# Altium PCB octopus_pcb.PcbDoc
Units mm, origin at the board's own origin, x right, y up, seen from the top; angles counter-clockwise.
Board outline 53.1 x 48.2 mm, 2 copper layers (Top Layer, Bottom Layer), stack 0.976 mm thick; 25 components, 19 nets, 84 pads, 4 vias.
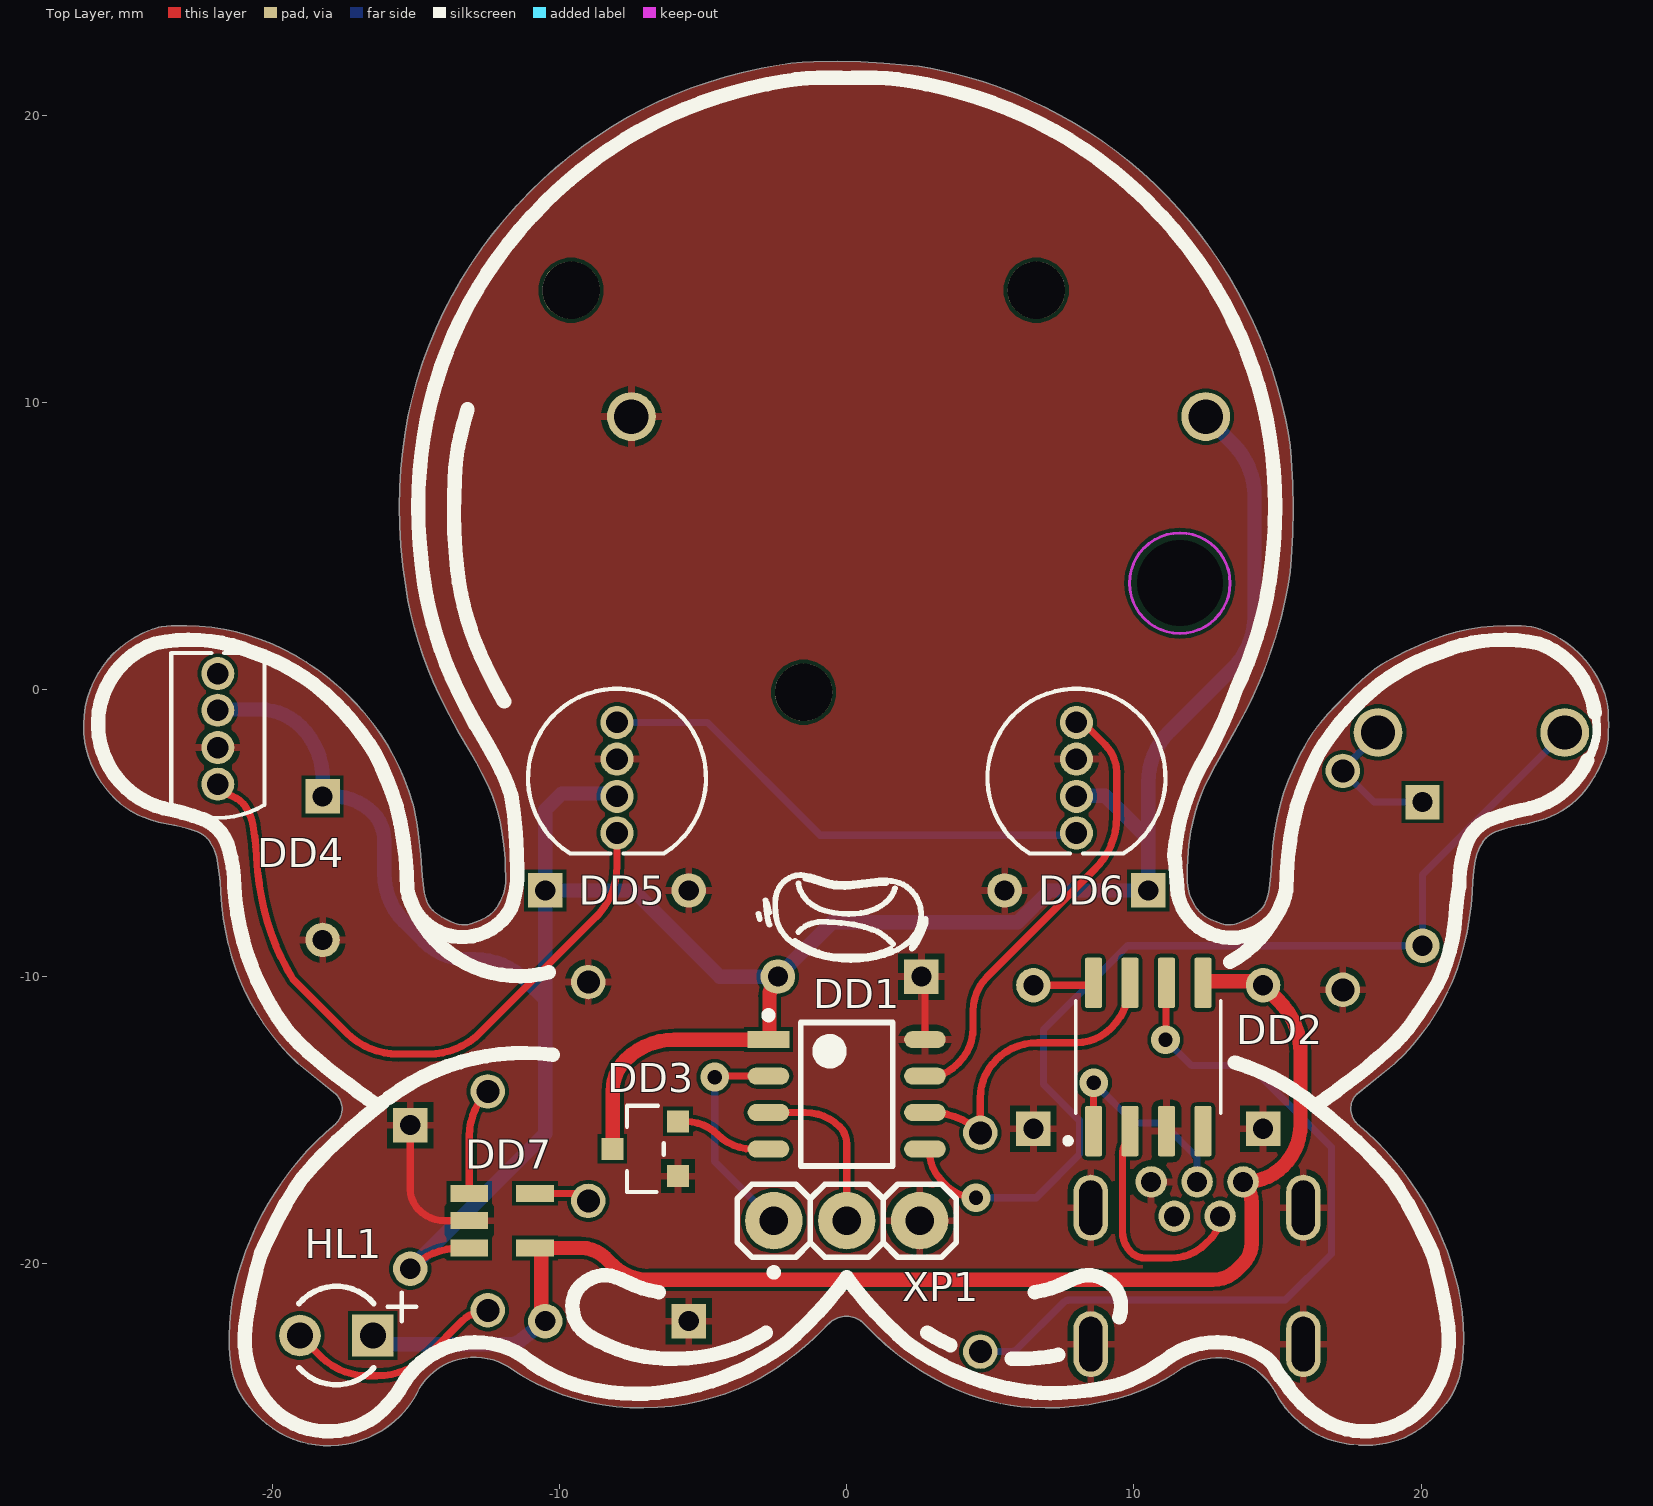
[diagram p0: Top Layer view]
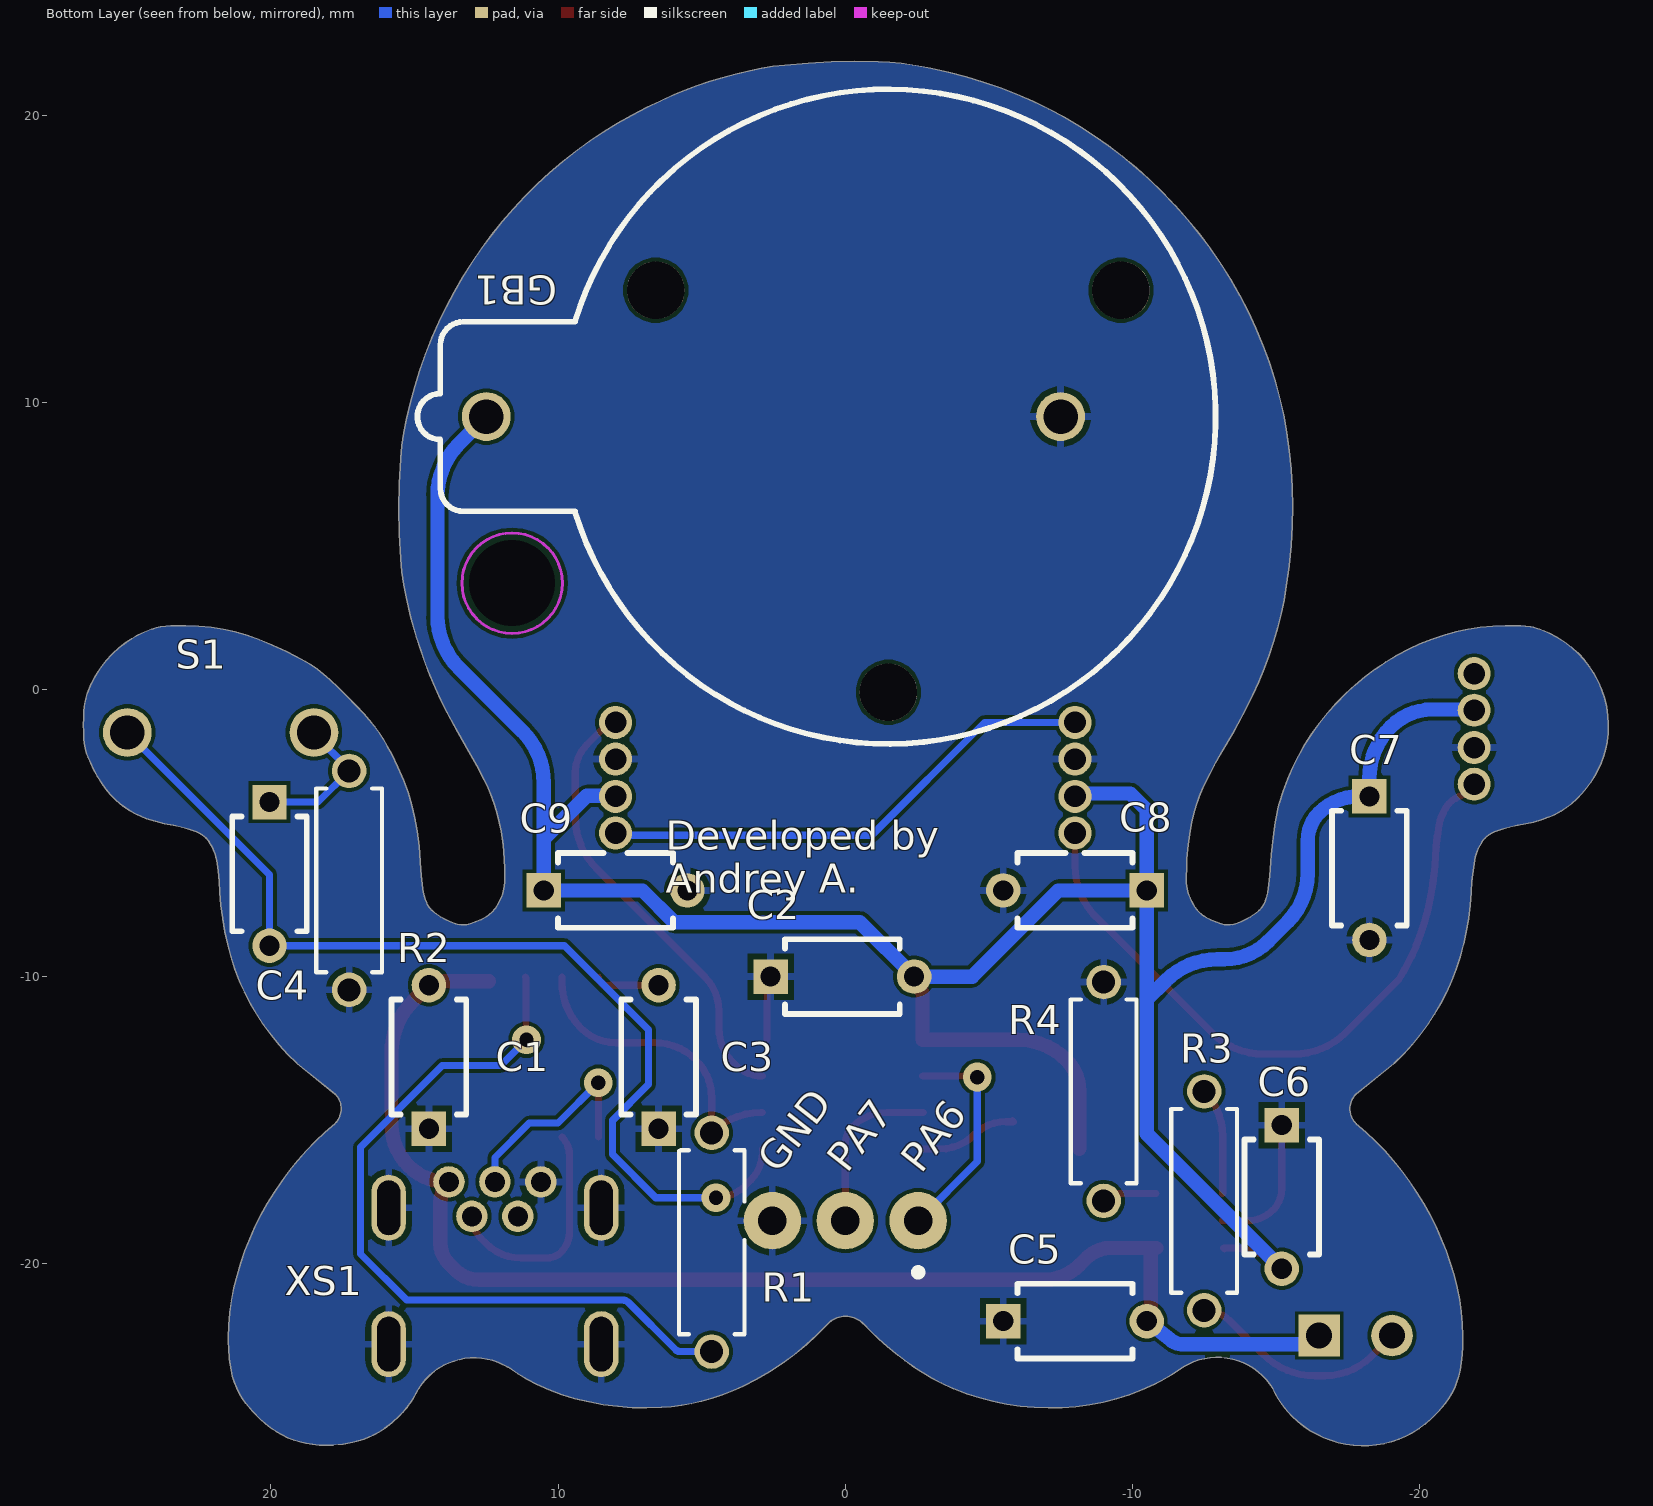
[diagram p1: Bottom Layer view, seen from below]

## Layer stack, top to bottom
Top Solder: solder mask 0.0102, Solder Resist, Dk 3.5
Top Layer: signal copper 0.018
Dielectric 1: dielectric 0.94, FR-4, Dk 4.8
Bottom Layer: signal copper 0.018
Bottom Solder: solder mask 0.0102, Solder Resist, Dk 3.5

## Board outline
313 vertices, not listed, extent -26.574,-26.336 26.528,21.866

## Design rules (kind name [scope] priority, off if disabled: settings)
Clearance [All] p1: gap=0.125 ignorepadtopadclearanceinfootprint=FALSE
HoleSize [All] p1: absolutevalues=TRUE maxlimit=5 minlimit=0.025 maxpercent=80.000 minpercent=20.000
MinimumSolderMaskSliver [All] p1: minsoldermaskwidth=0.1
PolygonConnect [All] p1: connectstyle=Relief reliefconductorwidth=0.254 reliefentries=4 polygonreliefangle="90 Angle" airgapwidth=0.2
RoutingVias [All] p1: holewidth=0.711 width=1.27 viastyle="Through Hole" minholewidth=0.711 minwidth=1.27 maxholewidth=0.711 maxwidth=1.27
SilkToSolderMaskClearance [IsPad] p1: minsilkscreentomaskgap=0.1 clearancetoexposedcopper=TRUE
SolderMaskExpansion [All] p1: expansion=0.102 istentingtop=FALSE
SupplyNets "Schematic Supply Nets_4" [InNet('VBAT')] p1: voltage=0.000
SupplyNets "Schematic Supply Nets_3" [InNet('VIN')] p2: voltage=0.000
SupplyNets "Schematic Supply Nets_2" [InNet('GND')] p3: voltage=0.000
Width [All] p1: maxlimit=0.5 minlimit=0.25 preferedwidth=0.254
27 further rules are at their usual default settings.

## Classes and differential pairs
component class octopus_sch: C1 C2 C3 C4 C5 C6 C7 C8 C9 DD1 DD2 DD3 DD7 GB1 HL1 R1 R2 R3 R4 S S1 XP1 XS1

## Components (designator, comment, footprint, x,y, rotation, side; value= is the part's Value field where it differs from the comment)
C1 "Capacitor" "THT CAP" 14.5,-12.8 r90 bottom value="0,1 мк"
C2 "Capacitor" "THT CAP" 0.1,-10 r180 bottom value="0,1 мк"
C3 "Capacitor" "THT CAP" 6.5,-12.8 r90 bottom value="0,1 мк"
C4 "Capacitor" "THT CAP" 20.05,-6.425 r270 bottom value="0,1 мк"
C5 "Capacitor" "THT CAP" -8,-22 r180 bottom value="4,7 мк"
C6 "Capacitor" "THT CAP" -15.2,-17.675 r270 bottom value="10,0 мк"
C7 "Capacitor" "THT CAP" -18.25,-6.225 r270 bottom value="0,1 мк"
C8 "Capacitor" "THT CAP" -8,-7 r0 bottom value="0,1 мк"
C9 "Capacitor" "THT CAP" 8,-7 r180 bottom value="0,1 мк"
DD1 "ATTINY412-SSN" SOIC-8 0,-14.1 r0 top
DD2 "CH340N" SOP8 10.5,-12.8 r90 top
DD3 "MAX809" SOT23-3 -7,-16 r180 top
DD4 "WS2812B" "LED RGB horizontal" -21.9,-1.375 r90 top
DD5 "WS2812B" LED_RGB_5MM -8,-3.075 r270 top
DD6 "WS2812B" LED_RGB_5MM 8,-3.075 r270 top
DD7 "XT4052" SOT23-5 -12,-18.5 r0 top
GB1 "L-KLS5-CR2032-03" L-KLS5-CR2032-03 -1.5,9.5 r180 bottom
HL1 "LED" 3mm_led_red -17.77,-22.499 r180 top
R1 "Resistor" RES_THT_025W_1k 4.65,-19.25 r270 bottom value="1,0 к"
R2 "Resistor" RES_THT_025W_10k 17.275,-6.65 r270 bottom value="10 к"
R3 "Resistor" RES_THT_025W_1k -12.5,-17.81 r90 bottom value=330
R4 "Resistor" RES_THT_025W_100k -9,-14 r270 bottom value="51 к"
S1 "KLS7-TS3601" KLS7-TS3601 25,-1.5 r180 bottom
XP1 "PLS-3" PLS3 -2.54,-18.5 r90 top
XS1 "Mini-USB-B5F" KLS1-229-5FA 15.9,-18.05 r180 bottom

## Footprints (in the part's own frame and the unit in brackets; to place one, negate y for a bottom-side part, rotate by r counter-clockwise, add the part's x,y. Pads: shape width x height; smd on the part's side, far side on the other; paste and mask are expansions set on the pad)
3mm_led_red [mm]
  rect 1.45x1.45 hole 0.9 paste-2539.97 mask+0: 1(-1.27,0.001)
  round 1.45 hole 0.9 paste-2539.97 mask+0: 2(1.27,0.001)
  silkscreen extent -2.78,-1.71 1.3,1.71, body extent -1.92,-1.92 1.65,1.92, height 5.3
KLS1-229-5FA [mm] "Mini-USB-B5F PCB Right Angle. DIP Type."
  round 1.1 hole 0.7 mask+0.1: 1(2.1,0.9) 2(2.9,-0.3) 3(3.7,0.9) 4(4.5,-0.3) 5(5.3,0.9)
  oval 1.2x2.3 hole 0.8 slot 1.9 at 90 deg mask+0.1: 5(0,-4.75) 5(0,0) 5(7.4,-4.75) 5(7.4,0)
  body extent -0.15,-7.93 7.55,1.07, height 3.95
KLS7-TS3601 [mm]
  round 1.7 hole 1.2 mask+0.1: 1(0,0) 2(6.5,0)
  body extent -0.68,-1.75 7.18,1.75, height 4.2
L-KLS5-CR2032-03 [mm] "L-KLS5-CR2032-03, Держатель батареи CR2032"
  round 2 hole 2 unplated: MH1(-8.1,4.4) MH2(8.1,4.4) MH3(0,-9.6)
  round 1.7 hole 1.2 mask+0.1: N(6,0)
  round 1.7 hole 1.2: P(-14,0)
  silkscreen extent -16.4,-11.4 11.4,11.4, body extent -16.39,-11.4 11.4,11.4, height 8.5
"LED RGB horizontal" [mm] "5mm RGB LED"
  round 1.15 hole 0.75 mask+0.075: 1(1.925,0) 2(0.65,0) 3(-0.65,0) 4(-1.925,0)
  silkscreen extent -3.1,-1.63 2.64,1.63
LED_RGB_5MM [mm] "5mm RGB LED"
  round 1.15 hole 0.75 mask+0.075: 1(1.925,0) 2(0.65,0) 3(-0.65,0) 4(-1.925,0)
  silkscreen extent -3.1,-3.1 2.64,3.1, body extent -2.93,-2.95 2.52,2.95, height 8.6
PLS3 [mm]
  round 2 hole 1: 1(0,0) 2(0,-2.54) 3(0,-5.08)
  silkscreen extent -1.92,-6.35 1.27,1.27, body extent -1.27,-6.35 1.27,1.27, height 8.44
RES_THT_025W_1k [mm]
  round 1.2 hole 0.8: 1(-3.81,0) 2(3.81,0)
  silkscreen extent -3.2,-1.14 3.2,1.14, body extent -4.06,-1.16 4.06,1.16, height 2.87
RES_THT_025W_10k [mm]
  round 1.2 hole 0.8: 1(-3.81,0) 2(3.81,0)
  silkscreen extent -3.2,-1.14 3.2,1.14, body extent -4.06,-1.16 4.06,1.16, height 2.87
RES_THT_025W_100k [mm]
  round 1.2 hole 0.8: 1(-3.81,0) 2(3.81,0)
  silkscreen extent -3.2,-1.14 3.2,1.14, body extent -4.06,-1.16 4.06,1.16, height 2.87
SOIC-8 [mm] "for operational amplifier"
  rect 1.45x0.6 smd: 1(-2.725,1.905)
  oval 1.45x0.6 smd: 2(-2.725,0.635) 3(-2.725,-0.635) 4(-2.725,-1.905) 5(2.725,-1.905) 6(2.725,-0.635) 7(2.725,0.635) 8(2.725,1.905)
  silkscreen extent -2.85,-2.5 1.6,2.88, body extent -3,-2.5 3,2.5, height 1.75
SOP8 [mm]
  rrect25% 1.76x0.6 smd: 1(-2.58,1.905) 2(-2.58,0.635) 3(-2.58,-0.635) 4(-2.58,-1.905) 5(2.58,-1.905) 6(2.58,-0.635) 7(2.58,0.635) 8(2.58,1.905)
  silkscreen extent -3.02,-2.52 1.95,2.89, body extent -3,-2.42 3,2.42, height 2.1
SOT23-3 [mil]
  rect 30x30 smd: 1(-44.29,37.4) 2(-44.29,-37.6) 3(45.71,-0.1)
  silkscreen extent -25,-59 26,59, body extent -48,-60 50,59, height 41
SOT23-5 [mm] "5mm RGB LED"
  rect 1.32x0.59 smd: 1(-1.145,0.95) 2(-1.145,0) 3(-1.145,-0.95) 4(1.145,-0.95) 5(1.145,0.95)
  body extent -1.4,-1.45 1.4,1.45, height 1.45
"THT CAP" [mm]
  rect 1.2x1.2 hole 0.7 paste-2539.97 mask+0: 1(-2.5,0)
  round 1.2 hole 0.7 paste-2539.97 mask+0: 2(2.5,0)
  silkscreen extent -2,-1.3 2,1.3, body extent -2.72,-1.3 2.72,1.3, height 6.6

## Part data
C1 C2 C3 C4 C5 C6 C7 C8 C9: library part "0,1 мк", "Конденсатор", Part Number=Capacitor
DD1: library part ATTINY412, "Микроконтроллер", Datasheet=https://static.chipdip.ru/lib/607/DOC011607871.pdf, Part Number=ATTINY412, Автор=klegot
DD2: "Преобразователь интерфейса USB в UART", Datasheet=https://static.chipdip.ru/lib/375/DOC030375417.pdf, Part Number=CH340N, Автор=klegot
DD3: "Формирователь импульса сброса (супервизор питания)", Datasheet=https://static.chipdip.ru/lib/848/DOC018848681.pdf, Part Number=MAX809, Автор=klegot
DD4: library part XT4052, "Контроллер заряда Li-Ion аккумуляторов, 4.2 В", Datasheet=https://orion43.ru/datasheets/34208.pdf?ysclid=mr598nxlrz92742175, Part Number=XT4052, Автор=klegot
DD5 DD6: "Адресный светодиод", Datasheet=https://static.chipdip.ru/lib/554/DOC001554925.pdf, Part Number=WS2812B, Автор=klegot
DD7: library part WS2812B, "Адресный светодиод", Datasheet=https://static.chipdip.ru/lib/554/DOC001554925.pdf, Part Number=WS2812B, Автор=klegot
GB1: "Держатель батареи CR2032", Datasheet=https://static.chipdip.ru/lib/516/DOC014516710.pdf, Part Number=L-KLS5-CR2032-03, Автор=klegot
HL1: "Светодиод", Color={Цвет}, Part Number=LED
R1 R3: library part Resistor_1.0k_1_0603, "Резистор номиналом 1,0 кОм 1%", Tolerance=1%, Part Number=Resistor_1.0k_1_0603
R2: library part Resistor_10k_1_0603, "Резистор номиналом 10 кОм 1%", Tolerance=1%, Part Number=Resistor_10k_1_0603
R4: library part Resistor_100k_1_0603, "Резистор номиналом 100 кОм 1%", Tolerance=1%, Part Number=Resistor_100k_1_0603
S1: "Тактовая кнопка", Datasheet=https://static.chipdip.ru/lib/551/DOC001551910.pdf, Part Number=KLS7-TS3601, Автор=klegot
XP1: "Гребенка 3 пина", Value1={Value1}, Value2={Value2}, Value3={Value3}, Datasheet=https://static.chipdip.ru/lib/177/DOC040177951.pdf, Part Number=PLS-3, System=Connector, Автор=rreali
XS1: "Разъем mini USB, розетка угловая на плату", Datasheet=https://static.chipdip.ru/lib/743/DOC016743759.pdf, Part Number=Mini-USB-B5F, System=Connector, Автор=klegot

## Free pads (board coordinates)
  round 0 hole 3 unplated mask-2539.97: 0(11.6,3.7)

## Via types
v1: diameter 1, hole 0.5, Top Layer to Bottom Layer, tented both sides, 4 vias

## Nets (pads, with @x,y where several pads share a name; then routed paths per layer and width w, separated by ;. In a path a pad name is that pad's centre, name@x,y a point inside that pad or via, vN(x,y) a via of type N, cw(c..) or ccw(c..) an arc to the next point about the centre after c; other vN are vias at no path point)
GND: C1.1 C2.1 C3.1 C5.1 C6.1 C7.2 C8.2 C9.2 DD1.8 DD2.3 DD3.1 DD4.3 DD5.3 DD6.3 DD7.2 GB1.N R2.2 R4.1 XP1.3 XS1.5 | length 7.1
  Top Layer w0.25: C6.1 -15.2,-17.401 ccw(c-14.176,-17.401) -14.9,-18.125 ccw(c-13.995,-17.22) -13.995,-18.5 DD7.2 ; C2.1 cw(c2.298,-10.302) 2.725,-10.302 DD1.8
LED: DD1.7 DD6.4 | length 15.8
  Top Layer w0.25: DD1.7@2.887,-13.465 ccw(c2.887,-12.143) 3.822,-13.078 3.9,-13 ccw(c2.693,-11.793) 4.4,-11.793 4.4,-11.2 cw(c6.09,-11.2) 4.895,-10.005 8.656,-6.244 ccw(c6.86,-4.448) 9.4,-4.448 9.4,-2.9 ccw(c8.012,-2.9) 8.993,-1.918 DD6.4@8,-0.925
NetC3_2: C3.2 DD2.8 | length 2.3
  Top Layer w0.254: C3.2 8.412,-10.3 8.595,-10.117 DD2.8@8.595,-10.012
NetC4_1: C4.1 R2.1 S1.2 | length 5.1
  Bottom Layer w0.25: S1.2 18.5,-1.557 17.275,-2.782 R2.1 18.36,-3.925 C4.1
NetC4_2: C4.2 DD1.5 S1.1 | length 35.6
  Top Layer w0.25: DD1.5@2.887,-16.005 2.887,-16.104 ccw(c4.296,-16.104) 3.3,-17.1 3.476,-17.276 ccw(c4.5,-16.251) v1(4.5,-17.7)
  Bottom Layer w0.25: v1(4.5,-17.7) 6.6,-17.7 8.1,-16.2 8.1,-15 6.853,-13.753 6.853,-11.853 9.78,-8.925 C4.2 20.05,-6.45 S1.1
NetDD1_2: DD1.2 XP1.1 | length 7.8
  Top Layer w0.254: v1(-4.6,-13.5) -4.565,-13.465 -2.788,-13.465 DD1.2@-2.688,-13.465
  Bottom Layer w0.254: v1(-4.6,-13.5) -4.6,-16.44 XP1.1
NetDD1_3: DD1.3 XP1.2 | length 5.9
  Top Layer w0.254: DD1.3 -1.441,-14.735 cw(c-1.441,-16.425) -0.246,-15.23 cw(c-0.84,-15.824) 0,-15.824 XP1.2
NetDD1_4: DD1.4 DD3.2 | length 3.5
  Top Layer w0.254: DD3.2@-5.825,-15.025 -5.85,-15.05 -5.586,-15.05 cw(c-5.586,-16.586) -4.5,-15.5 ccw(c-3.281,-14.281) -3.281,-16.005 DD1.4@-2.688,-16.005
NetDD1_6: DD1.6 DD2.7 R1.1 | length 10.9
  Top Layer w0.254: DD1.6@2.887,-14.735 2.948,-14.735 cw(c2.948,-17.142) R1.1 4.65,-14.228 cw(c6.528,-14.228) 5.2,-12.9 cw(c6.649,-14.349) 6.649,-12.3 7.993,-12.3 ccw(c7.993,-10.593) 9.2,-11.8 ccw(c7.595,-10.195) 9.865,-10.195 DD2.7@9.865,-10.012
NetDD2_1: DD2.1 XS1.3 | length 7.4
  Top Layer w0.254: DD2.1@8.595,-15.587 DD2.1 8.595,-13.705 v1(8.6,-13.7)
  Bottom Layer w0.254: v1(8.6,-13.7) 10,-15.1 11,-15.1 12.2,-16.3 XS1.3
NetDD2_2: DD2.2 XS1.2 | length 8.1
  Top Layer w0.254: DD2.2@9.865,-15.588 ccw(c10.505,-16.227) 9.669,-15.88 ccw(c10.505,-16.227) 9.6,-16.227 9.6,-18.876 ccw(c10.624,-18.876) 9.9,-19.6 ccw(c10.383,-19.117) 10.383,-19.8 11.3,-19.8 ccw(c11.3,-18.11) 12.495,-19.305 12.682,-19.118 ccw(c11.914,-18.35) XS1.2
NetDD2_6: DD2.6 R1.2 | length 26.9
  Top Layer w0.25: v1(11.1,-12.2) 11.117,-12.183 11.117,-10.03 DD2.6@11.135,-10.012
  Bottom Layer w0.25: R1.2 5.736,-23.06 ccw(c5.736,-22.81) 5.913,-22.987 7.561,-21.339 cw(c7.737,-21.517) 7.737,-21.267 15.268,-21.267 16.879,-19.656 16.879,-15.943 14.036,-13.1 12,-13.1 v1(11.1,-12.2)
NetDD4_4: DD4.4 DD5.1 | length 24.4
  Top Layer w0.25: DD4.4@-22.2,-3.5 cw(c-22.802,-7.271) -21.392,-3.722 cw(c-21.777,-4.691) -20.926,-4.089 ; -20.926,-4.114 cw(c-22.151,-4.98) -20.67,-4.739 cw(c-30.867,-6.4) -20.55,-5.86 ccw(c-10.73,-5.345) -20.167,-8.11 ccw(c-12.445,-5.848) -19.282,-10.091 -17.417,-11.956 ccw(c-15.621,-10.16) -15.621,-12.7 -14.564,-12.7 ccw(c-14.564,-10.16) -12.768,-11.956 -8.606,-7.795 ; -8.744,-7.944 ccw(c-10.54,-6.148) -8.606,-7.795 ; DD5.1 -8,-6.148 cw(c-10.54,-6.148) -8.606,-7.795
NetDD5_4: DD5.4 DD6.1 | length 17.6
  Bottom Layer w0.254: DD5.4 -4.85,-1.15 -0.925,-5.075 DD6.1@8,-5.075
NetDD7_1: DD7.1 R3.2 | length 3.7
  Top Layer w0.254: DD7.1 -13.145,-15.557 cw(c-10.943,-15.557) R3.2
NetDD7_5: DD7.5 R4.2 | length 1.9
  Top Layer w0.25: DD7.5@-10.825,-17.55 -9.628,-17.55 cw(c-9.628,-18.438) R4.2
NetHL1_2: HL1.2 R3.1 | length 8.4
  Top Layer w0.25: HL1.2 -18.305,-23.235 ccw(c-16.7,-21.631) -16.7,-23.9 -16.352,-23.9 ccw(c-16.352,-21.36) -14.556,-23.156 -13.388,-21.988 cw(c-12.5,-22.875) R3.1 -12.655,-21.775 R3.1@-13.071,-21.775
VBAT: C2.2 C6.2 C7.1 C8.1 C9.1 DD1.1 DD3.3 DD4.2 DD5.2 DD6.2 DD7.3 GB1.P | length 96.2
  Top Layer w0.254: C6.2@-15.126,-20.175 C6.2 cw(c-13.45,-21.925) -13.45,-19.45 -13.175,-19.45 DD7.3@-13.208,-19.483
  Top Layer w0.5: DD3.3@-8.15,-16 -8.15,-13.986 cw(c-6.614,-13.986) -7.7,-12.9 cw(c-5.998,-14.602) -5.998,-12.195 -2.688,-12.195 -2.688,-10.694 cw(c-1.706,-10.694) C2.2
  Bottom Layer w0.5: DD4.2@-21.9,-0.675 ccw(c-21.84,-0.615) -21.84,-0.7 -20.449,-0.7 cw(c-20.449,-2.749) -19,-1.3 -18.994,-1.306 cw(c-20.79,-3.102) -18.25,-3.102 C7.1 -17.888,-3.725 cw(c-17.888,-5.688) -16.5,-4.3 cw(c-17.466,-5.266) -16.1,-5.266 -16.1,-6.41 ccw(c-13.71,-6.41) -15.4,-8.1 -14.736,-8.764 ccw(c-13.2,-7.227) -13.2,-9.4 -12.952,-9.4 cw(c-12.952,-11.94) -11.156,-10.144 -10.5,-10.8 ; C6.2 -10.5,-15.475 -10.5,-10.8 ; DD5.2@-8,-3.625 -9.925,-3.625 -10.5,-4.2 C8.1 ; DD6.2@8,-3.7 9,-3.7 10.5,-5.2 ; GB1.P 13.456,8.544 cw(c11.66,6.748) 14.2,6.748 14.2,2.552 cw(c11.66,2.552) 13.456,0.756 11.244,-1.456 ccw(c13.04,-3.252) 10.5,-3.252 10.5,-5.2 ; -10.5,-10.8 C8.1 ; C8.1 -7.42,-7 -4.42,-10 C2.2 -0.504,-8.104 5.957,-8.104 7.061,-7 C9.1 10.5,-5.2
VIN: C1.2 C5.2 DD2.5 DD7.4 HL1.1 XS1.1 | length 47.7
  Top Layer w0.5: DD7.4@-10.825,-19.45 DD7.4@-10.685,-19.45 ; C5.2 -10.634,-21.866 -10.634,-19.501 DD7.4@-10.685,-19.45 ; DD2.5@12.405,-10.166 14.161,-10.166 cw(c14.159,-10.666) C1.2 15.056,-10.856 cw(c13.26,-12.652) 15.8,-12.652 15.8,-15.151 cw(c13.751,-15.151) 15.2,-16.6 cw(c13.872,-15.272) 13.872,-17.15 XS1.1 cw(c13.076,-17.874) 14.1,-17.874 14.1,-19.276 cw(c13.076,-19.276) 13.8,-20 13.588,-20.212 cw(c12.743,-19.367) 12.743,-20.562 -6.9,-20.562 cw(c-6.9,-18.78) -8.16,-20.04 -8.4,-19.8 ccw(c-9.245,-20.645) -9.245,-19.45 DD7.4@-10.685,-19.45
  Bottom Layer w0.5: HL1.1 -16.025,-22.8 -11.697,-22.8 ccw(c-11.697,-22.3) -11.389,-22.694 C5.2
pads on no net: DD2.4 DD4.1 GB1.MH1 GB1.MH2 GB1.MH3 XS1.4

## Polygon pours and split planes (outlines as drawn)
GND on Bottom Layer "Bottom Layer-GND" (solid, pour order 1): 313 vertices, not listed, extent -26.574,-26.336 26.528,21.866
GND on Top Layer "Top Layer-GND" (solid, pour order 0): 313 vertices, not listed, extent -26.574,-26.336 26.528,21.866

## Keep-outs
Keep-Out Layer:
  circle w0.1: c11.6,3.7 r1.75

## Silkscreen, mask and mechanical layers (free items; w line width, h text height)
Top Overlay:
  drawing of 230 lines, arcs and shapes, not listed
Bottom Overlay:
  text "Developed by / Andrey A." at 6.255,-7.079 h1
  text "PA7" at -0.072,-16.883 h1 r308.05
  text "PA6" at -2.647,-16.908 h1 r308.05
  text "GND" at 2.353,-16.908 h1 r308.05
Top Solder:
  drawing of 109 lines, arcs and shapes, not listed
Bottom Solder:
  circle w1.55: c11.6,3.7 r0.775
Mechanical 4:
  drawing of 198 lines, arcs and shapes, not listed